# EAGLE board led2b (EAGLE 7.7.0)
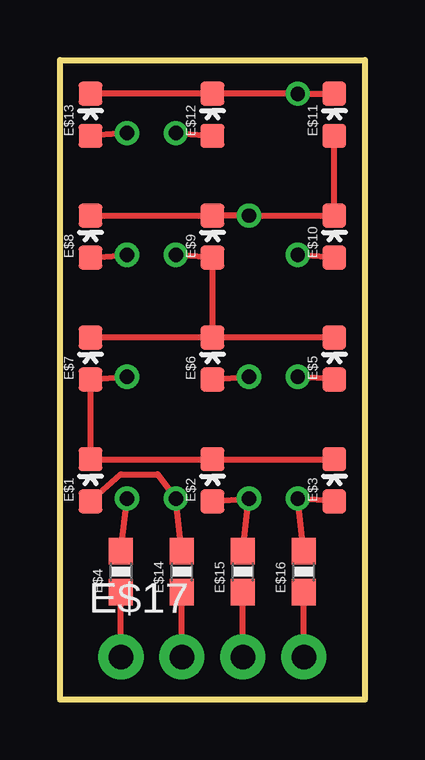
[diagram p0: board, top side]
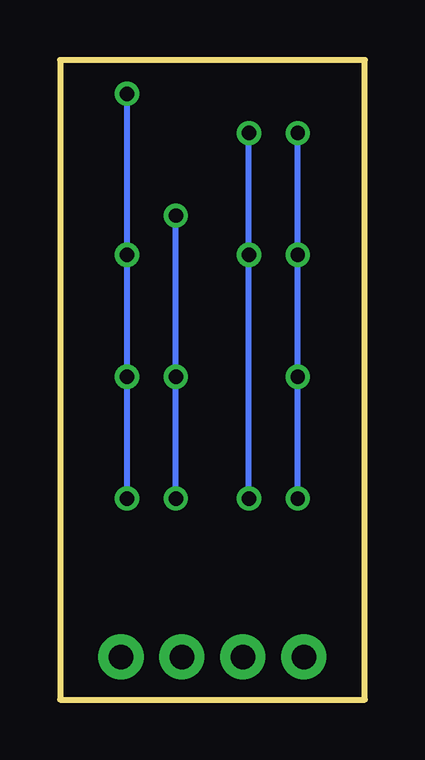
[diagram p1: board, bottom side, seen from below]

Size 12.7 x 26.67 mm. Coordinates in mm from the lower left corner, seen from the top.
Outline: 0,26.67 12.7,26.67 12.7,0 0,0 0,26.67
Copper layers (1*16): Top 0.035mm / dielectric 1.5mm / Bottom 0.035mm
Design rules "default": minimum track width 10mil, minimum drill 24mil, track to track 8mil, track to pad 8mil, pad to pad 8mil, via to via 8mil, smd to smd 8mil, copper to edge 40mil, drill to drill 8mil, minimum pad ring 10mil, minimum via ring 8mil, stop-mask expansion 4mil, vias tented up to drill 0mil, thermal gap 10mil

## Footprints (pad centres in the part's own frame; a part is rotated, then mirrored left to right if it is on the bottom)
LED-0603 = smd 1 x 1: A 0,-0.877; C 0,0.877
0603-RES = smd 1.1 x 1: 1 -0.85,0; 2 0.85,0
1X04_NO_SILK_ALL_ROUND = drill 1.016 pad 1.88: 1 0,0; 2 2.54,0; 3 5.08,0; 4 7.62,0

## Placement (x,y rotation side)
E$1  [LED-0603]  1.27,9.14 0 top
E$2  [LED-0603]  6.35,9.14 0 top
E$3  [LED-0603]  11.43,9.14 0 top
E$4  [0603-RES]  2.54,5.33 90 top
E$5  [LED-0603]  11.43,14.22 0 top
E$6  [LED-0603]  6.35,14.22 0 top
E$7  [LED-0603]  1.27,14.22 0 top
E$8  [LED-0603]  1.27,19.3 0 top
E$9  [LED-0603]  6.35,19.3 0 top
E$10  [LED-0603]  11.43,19.3 0 top
E$11  [LED-0603]  11.43,24.38 0 top
E$12  [LED-0603]  6.35,24.38 0 top
E$13  [LED-0603]  1.27,24.38 0 top
E$14  [0603-RES]  5.08,5.33 90 top
E$15  [0603-RES]  7.62,5.33 90 top
E$16  [0603-RES]  10.16,5.33 90 top
E$17  [1X04_NO_SILK_ALL_ROUND]  2.54,1.78 0 top

## Library data of the parts
E$1-E$3 E$5-E$13 = SparkFun-LED
E$4 E$14-E$16 = SparkFun-Resistors
E$17 = SparkFun-Connectors

## Nets
FOUR: E$1.C E$2.C E$3.C E$4.2 E$7.A E$8.A E$13.A
ONE: E$3.A E$5.A E$10.A E$11.C E$12.C E$13.C E$16.2
S$5: E$4.1 E$17.1
S$6: E$14.1 E$17.2
S$7: E$15.1 E$17.3
S$8: E$16.1 E$17.4
THREE: E$1.A E$5.C E$6.C E$7.C E$9.A E$12.A E$14.2
TWO: E$2.A E$6.A E$8.C E$9.C E$10.C E$11.A E$15.2

## Tracks (layer width: path | path; a pad name or v marks a point on that pad's centre or on a via)
FOUR  (via drill 0.6)
  Top 0.254: E$3.C E$2.C E$1.C E$7.A v2.79,13.46 | E$4.2 v2.79,8.38 | E$8.A v2.79,18.54 | v2.79,23.62 E$13.A
  Bottom 0.254: v2.79,8.38 v2.79,13.46 v2.79,18.54 v2.79,23.62
ONE  (via drill 0.6)
  Top 0.254: E$13.C E$12.C v9.91,25.26 E$11.C | E$16.2 v9.91,8.38 E$3.A | E$5.A v9.91,13.46 | E$10.A v9.91,18.54
  Bottom 0.254: v9.91,8.38 v9.91,13.46 v9.91,18.54 v9.91,25.26
S$5
  Top 0.254: E$17.1 E$4.1
S$6
  Top 0.254: E$17.2 E$14.1
S$7
  Top 0.254: E$17.3 E$15.1
S$8
  Top 0.254: E$17.4 E$16.1
THREE  (via drill 0.6)
  Top 0.254: E$5.C E$6.C | E$6.C E$7.C | E$6.C E$9.A v4.83,18.54 | E$14.2 v4.83,8.38 4.06,9.4 2.54,9.4 E$1.A | v4.83,23.62 E$12.A
  Bottom 0.254: v4.83,8.38 v4.83,18.54 v4.83,23.62
TWO  (via drill 0.6)
  Top 0.254: E$8.C E$9.C v7.87,20.18 E$10.C E$11.A | E$15.2 v7.87,8.38 E$2.A | E$6.A v7.87,13.46
  Bottom 0.254: v7.87,8.38 v7.87,13.46 v7.87,20.18